# EAGLE board BoB Brain v02 (EAGLE 7.5.0)
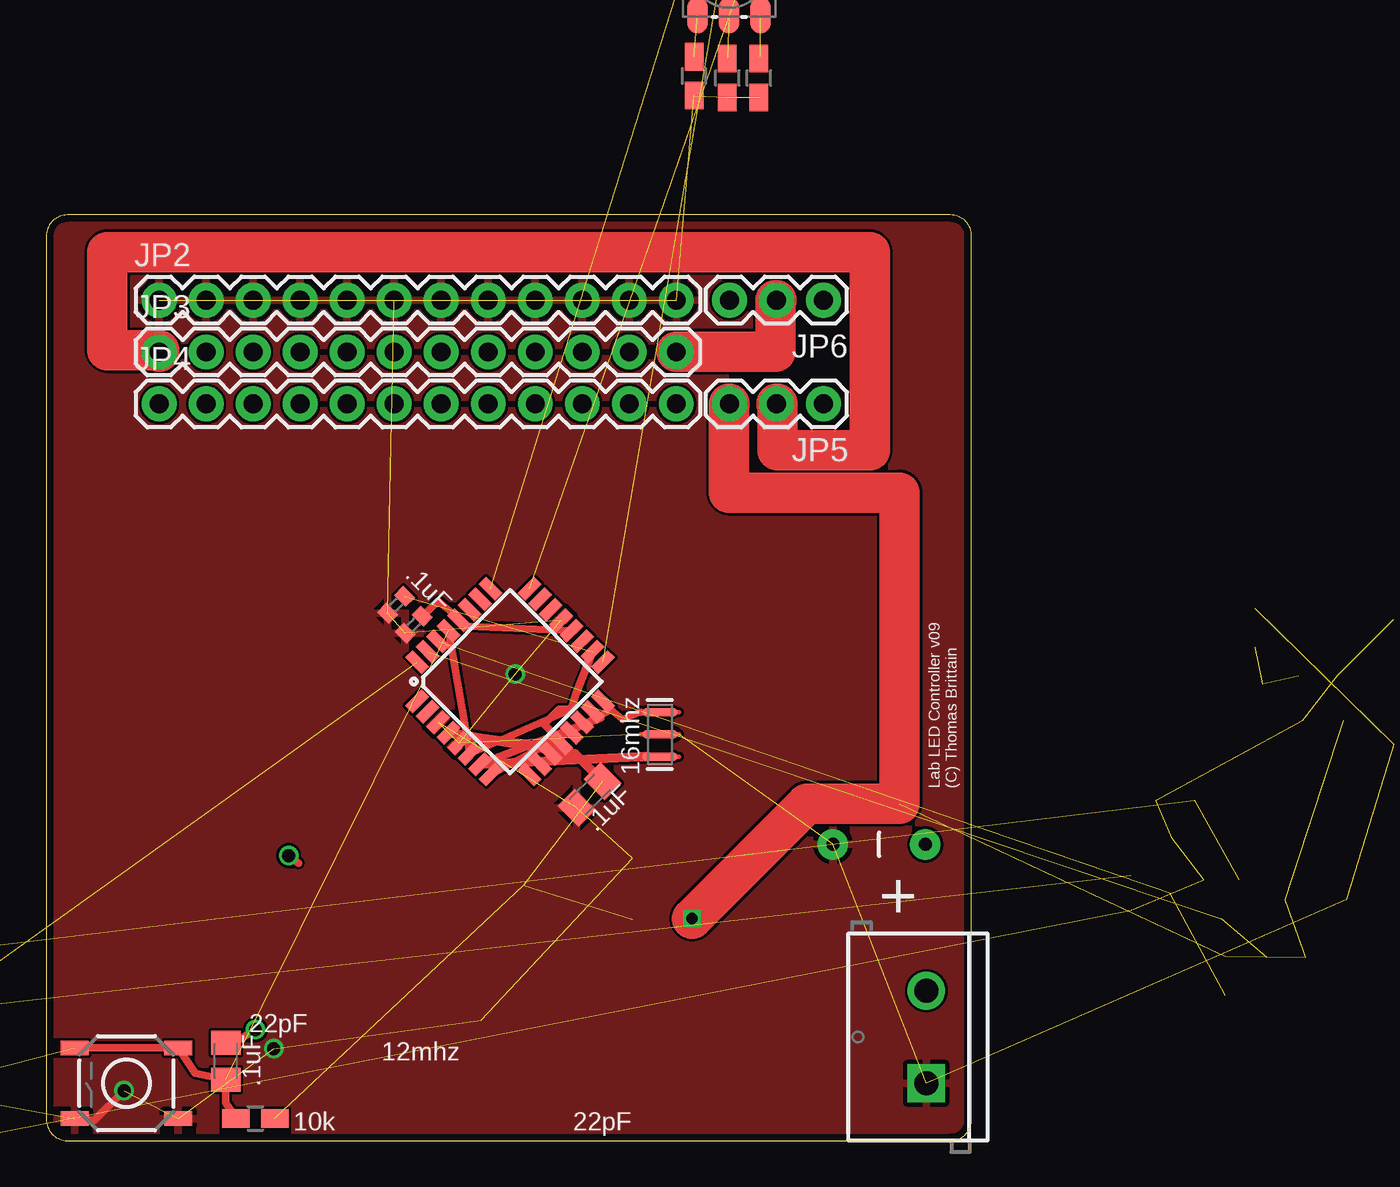
[diagram p0: board, top side]
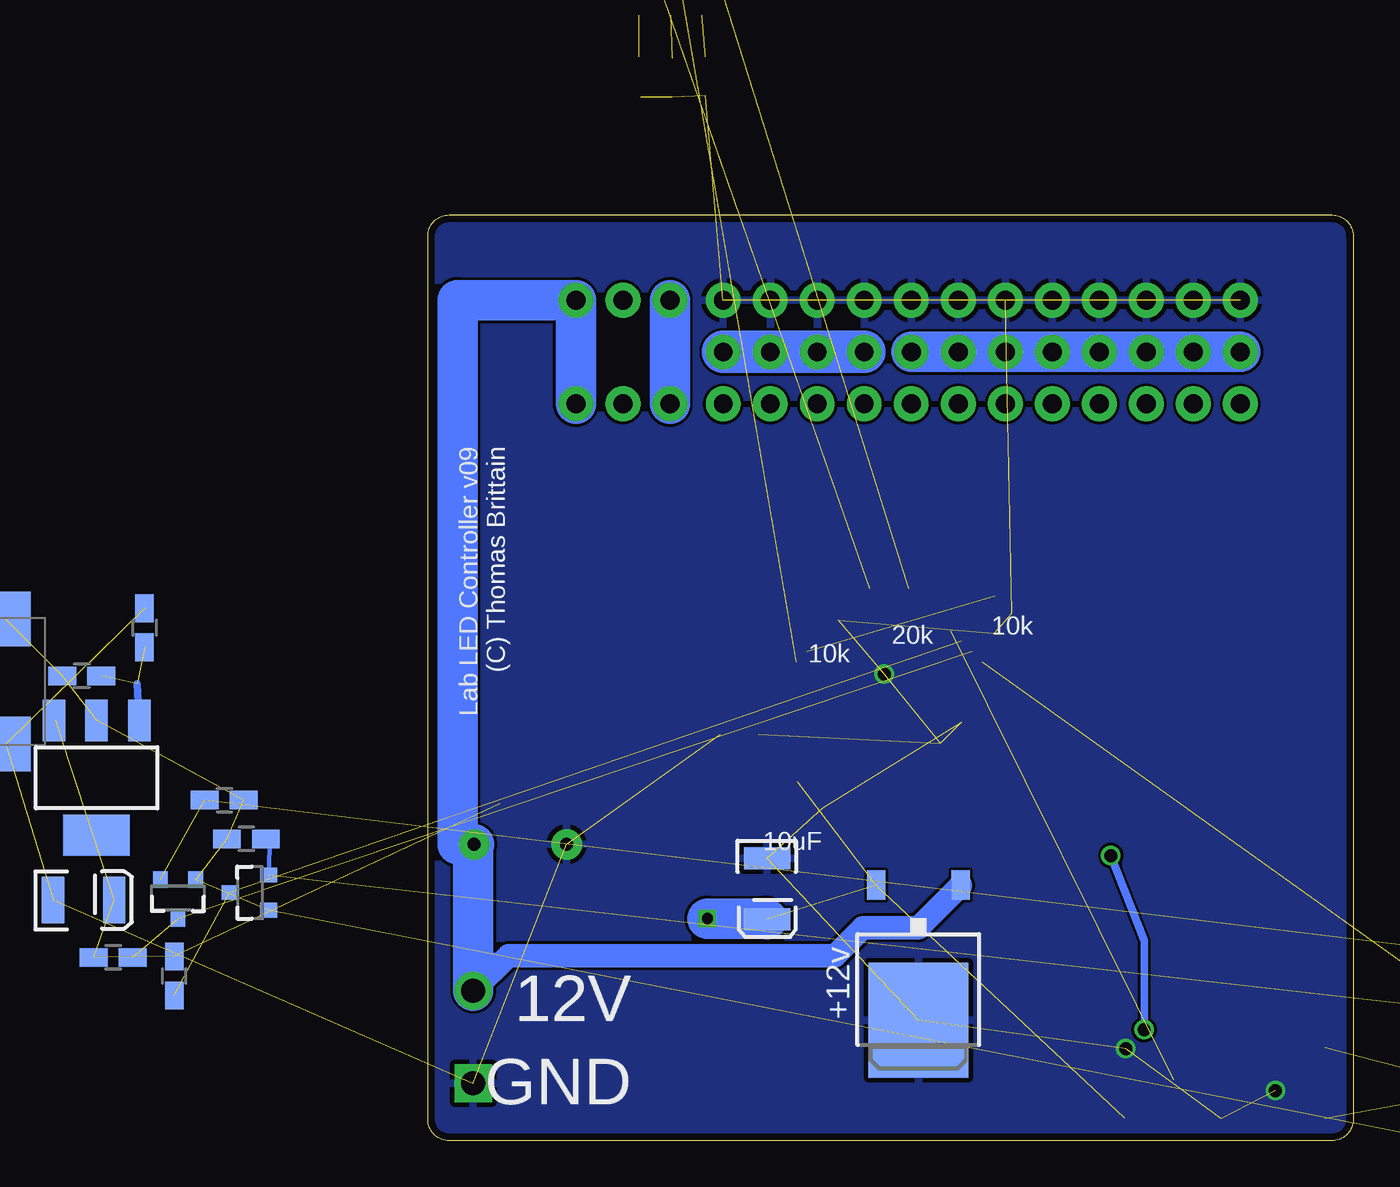
[diagram p1: board, bottom side, seen from below]

Size 50 x 50 mm. Coordinates in mm from the lower left corner, seen from the top.
Outline: 0,48.86 0,1.14 arc90 1.14,0 48.86,0 arc90 50,1.14 50,48.86 arc90 48.86,50 1.14,50 arc90 0,48.86
Copper layers (1*16): Top 0.0356mm / dielectric 1.5011mm / Bottom 0.0356mm
Design rules "LaenPCBOrder": minimum track width 6mil, minimum drill 13mil, track to track 6mil, track to pad 6mil, pad to pad 6mil, via to via 6mil, smd to smd 6mil, copper to edge 15mil, drill to drill 6mil, minimum pad ring 7mil, minimum via ring 7mil, stop-mask expansion 3mil, vias tented up to drill 0mil, thermal gap 10mil

## Footprints (pad centres in the part's own frame; a part is rotated, then mirrored left to right if it is on the bottom)
CAP-PTH-5MM = drill 0.7 pad 1.651: 1 -2.5,0; 2 2.5,0
EIA3528 = smd 1.2 x 2.5: A 1.65,0; C -1.65,0
C0402 = smd 0.7 x 0.9: 1 -0.65,0; 2 0.65,0
C0805K = smd 1.3 x 1.6: 1 -1,0; 2 1,0
D/7343-31W = smd 2.95 x 2.7: + 3.375,0; - -3.375,0
SCREWTERMINAL-5MM-2 = drill 1.3 pad 2.032 square: 1 0,0 | drill 1.3 pad 2.032: 2 5,0
1X12 = drill 1.016 pad 1.88: 1 0,0; 2 2.54,0; 3 5.08,0; 4 7.62,0; 5 10.16,0; 6 12.7,0; 7 15.24,0; 8 17.78,0; 9 20.32,0; 10 22.86,0; 11 25.4,0; 12 27.94,0
1X03 = drill 1.016 pad 1.88: 1 0,0; 2 2.54,0; 3 5.08,0
LED-TRICOLOR-5050 = smd 2 x 1.1: 1 -2.4,1.7; 2 -2.4,0; 3 -2.4,-1.7; 4 2.4,-1.7; 5 2.4,0; 6 2.4,1.7
SOT23-3 = smd 0.8 x 0.9: 1 -0.95,-1; 2 0.95,-1; 3 0,1.1
R0805W = smd 1.5 x 1: 1 -1.052,0; 2 1.052,0
TACTILE-SWITCH-SMD = smd 1.524 x 0.762: 1 -2.794,1.905; 2 2.794,1.905; 3 -2.794,-1.905; 4 2.794,-1.905
TQFP32-08 = smd 1.27 x 0.559: 1 -4.293,2.8; 2 -4.293,2; 3 -4.293,1.2; 4 -4.293,0.4; 5 -4.293,-0.4; 6 -4.293,-1.2; 7 -4.293,-2; 8 -4.293,-2.8; 17 4.293,-2.8; 18 4.293,-2; 19 4.293,-1.2; 20 4.293,-0.4; 21 4.293,0.4; 22 4.293,1.2; 23 4.293,2; 24 4.293,2.8 | smd 0.559 x 1.27: 9 -2.8,-4.293; 10 -2,-4.293; 11 -1.2,-4.293; 12 -0.4,-4.293; 13 0.4,-4.293; 14 1.2,-4.293; 15 2,-4.293; 16 2.8,-4.293; 25 2.8,4.293; 26 2,4.293; 27 1.2,4.293; 28 0.4,4.293; 29 -0.4,4.293; 30 -1.2,4.293; 31 -2,4.293; 32 -2.8,4.293
TO-252 = smd 1 x 1.6: 1 -2.28,-4.8; 2 2.28,-4.8 | smd 5.4 x 6.2: 3 0,2.5
SOT223 = smd 1.219 x 2.235: 1 -2.311,-3.099; 2 0,-3.099; 3 2.311,-3.099 | smd 3.6 x 2.2: 4 0,3.099
HM-11 = smd 1.9 x 0.9: 1 -0.3,11.5; 2 -0.3,10; 3 -0.3,8.5; 4 -0.3,7; 5 -0.3,5.5; 6 -0.3,4; 7 -0.3,2.5; 8 -0.3,1; 9 13.8,1; 10 13.8,2.5; 11 13.8,4; 12 13.8,5.5; 13 13.8,7; 14 13.8,8.5; 15 13.8,10; 16 13.8,11.5
RESONATOR-SMD = smd 0.45 x 1.905: 1 -1.2,0; 2 0,0; 3 1.2,0

## Placement (x,y rotation side)
C1  big  [CAP-PTH-5MM]  45,16 180 top
C2  10uF  [EIA3528]  31.66,13.61 270 bottom
C3  0.1uF  [C0402]  19.85,27.87 225 top
C4  0.1uF  [C0805K]  29.36,18.7 225 top
C5  0.1uF  [C0805K]  9.7,4.3 270 top
C8  0.1uF  [C0402]  18.9,28.94 225 top
C10  10uF  [EIA3528]  68.6,13 0 bottom  (outside the outline)
C11  470uF  [D/7343-31W]  72.8,24.8 90 bottom  (outside the outline)
JP1  12V_INPUT  [SCREWTERMINAL-5MM-2]  47.55,3.1 90 top
JP2  [1X12]  6.1,45.4 0 top
JP3  [1X12]  6.1,42.6 0 top
JP4  [1X12]  6.1,39.8 0 top
JP5  JUMPER-3PTH  [1X03]  42,39.8 180 top
JP6  JUMPER-3PTH  [1X03]  42,45.4 180 top
LED1  LED-TRICOLOR-5050NO_IC  [LED-TRICOLOR-5050]  36.9,63.2 270 top  (outside the outline)
Q1  MOSFET-NCHANNELAO3404A  [SOT23-3]  63.5,13.1 180 bottom  (outside the outline)
Q9  MOSFET-NCHANNELAO3404A  [SOT23-3]  59.6,13.4 90 bottom  (outside the outline)
R1  1K  [R0805W]  -23.6,-6.1 0 top  (outside the outline)
R2  1K  [R0805W]  -23.6,-12.2 0 top  (outside the outline)
R11  100k  [R0805W]  35,57.5 90 top  (outside the outline)
R12  100k  [R0805W]  38.5,57.4 90 top  (outside the outline)
R13  100k  [R0805W]  36.8,57.4 90 top  (outside the outline)
R14  10k  [R0805W]  11.3,1.2 0 top
R17  220  [R0805W]  68.7,25.1 180 bottom  (outside the outline)
R18  370  [R0805W]  65.3,27.7 270 bottom  (outside the outline)
R19  10k  [R0805W]  63.7,8.9 90 bottom  (outside the outline)
R20  10k  [R0805W]  67,9.9 180 bottom  (outside the outline)
R21  10k  [R0805W]  59.8,16.3 180 bottom  (outside the outline)
R22  10k  [R0805W]  61,18.4 0 bottom  (outside the outline)
S1  TAC_SWITCHSMD  [TACTILE-SWITCH-SMD]  4.33,3.1 180 top
U1  ATMEGA328P_TQFP  [TQFP32-08]  25.06,24.79 45 top
U3  +12v  [TO-252]  23.5,9 180 bottom
U4  V_REG_317SMD  [SOT223]  67.9,19.6 180 bottom  (outside the outline)
U$1  HM-11  [HM-11]  -24.3,-2.1 0 top  (outside the outline)
Y1  16MHZ  [RESONATOR-SMD]  33.16,21.94 90 top

## Library data of the parts
C1 = SparkFun-Passives
C2 C10 = SparkFun-Capacitors
C3-C5 C8 C11 R1 R2 R11-R14 R17-R22 = resistor
JP1 = SparkFun-Connectors; STOREFRONT_ID: PRT-08432
JP2-JP4 = SparkFun-Connectors
JP5 JP6 = SparkFun-Retired
LED1 = SparkFun-LED
Q1 Q9 = SparkFun-DiscreteSemi; PROD_ID: TRAN-12988
S1 = SparkFun-Retired; PROD_ID: SWCH-08247
U1 = SparkFun-DigitalIC; PROD_ID: IC-09069
U3 = SparkFun-PowerIC; PROD_ID: VREG-12370
U4 = SparkFun-PowerIC
U$1 = HM-11-ladvien
Y1 = SparkFun-FreqCtrl; PROD_ID: XTAL-08900

## Nets
3.35V: C11.+ Q1.1 Q9.1 R17.2 R21.2 R22.2 U4.2 U$1.9
3~: U1.1
4: U1.2
5~: U1.9
6V: JP3.9 JP3.10 JP3.11 JP3.12 JP6.2
6~: U1.10
7: U1.11
8: U1.12
9~: U1.13
10~: U1.14
11~: U1.15
12: U1.16
13: LED1.2 U1.17
A0: U1.23
A1: LED1.1 U1.24
A2: LED1.3 U1.25
A3: U1.26
A4-SDA: U1.27
A5-SCL: U1.28
ADC6: U1.19
ADC7: U1.22
ATMEGA-RESET: R2.1 U$1.14
DTR: C5.1
GND: C1.2 C2.C C3.2 C4.2 C8.2 C10.C C11.- JP1.1 JP2.1 JP2.2 JP2.3 JP2.4 JP2.5 JP2.6 JP2.7 JP2.8 JP2.9 JP2.10 JP2.11 JP2.12 R11.1 R12.1 R13.1 R18.1 S1.1 S1.2 U1.3 U1.5 U1.21 U3.3 U$1.12 Y1.2
HM-RESET: R1.1 U1.32
N$1: C3.1 U1.20
N$2: U1.7 Y1.1
N$6: LED1.4 R11.2
N$7: JP4.12
N$8: LED1.6 R12.2
N$9: LED1.5 R13.2
N$10: JP4.11
N$11: U1.8 Y1.3
N$12: Q1.2 R22.1 U$1.2
N$14: R17.1 R18.2 U4.1
N$15: Q9.2 R21.1 U$1.4
N$16: JP4.10
N$17: JP4.9
N$18: JP4.8
N$19: JP4.7
N$20: JP4.6
N$21: JP4.5
N$22: JP4.4
N$23: JP4.3
N$24: JP4.2
N$25: JP4.1
PIN_PWR: JP3.1 JP3.2 JP3.3 JP3.4 JP3.5 JP3.6 JP3.7 JP3.8 JP5.2
RAW: C1.1 JP1.2 JP5.1 JP6.1 U3.1
RESET: C5.2 R1.2 R2.2 R14.1 S1.3 S1.4 U1.29 U$1.11
U2_RX: Q1.3 R20.1 U1.31
U2_TX: Q9.3 R19.1 U1.30
VCC: C2.A C4.1 C8.1 C10.A JP5.3 JP6.3 R14.2 R19.2 R20.2 U1.4 U1.6 U1.18 U3.2 U4.3

## Tracks (layer width: path | path; a pad name or v marks a point on that pad's centre or on a via)
3.35V  (7 unrouted)
6V
  Top 2.184: JP6.2 39.4,45.4 39.4,42.6 JP3.12
  Bottom 2.286: JP3.12 JP3.11 JP3.10 JP3.9
13  (1 unrouted)
A1  (1 unrouted)
A2  (1 unrouted)
ATMEGA-RESET  (1 unrouted)
DTR  (via drill 0.7 pad 0.25)
  Top 0.406: C5.1 9.7,5 v11.3,6 | v13.1,15.4 13.63,15
  Bottom 0.406: v11.3,6 11.3,10.8 v13.1,15.4
GND  (via drill 0.7, 0.7 pad 0.25)  (33 unrouted)
  Top 0.406: S1.2 2.6,1.09 v4.2,2.7
  other vias: 12.3,4.97 25.33,25.2
  pour Bottom: -1,51 51,51 51,-2 -1,-2
  pour Top: -1,-2 -1,51 51,51 51,-2
HM-RESET  (1 unrouted)
N$1
  Top 0.406: U1.20 22.73,27.77 21.93,28.52 21.18,29.12 C3.1
N$2
  Top 0.406: U1.7 29.96,22.84 | 32.37,20.74 Y1.1
  Top 0.508: 32.37,20.74 32.05,20.74 U1.7
N$6  (1 unrouted)
N$8  (1 unrouted)
  Top 0.559: 38.6,58.55 R12.2
N$9  (1 unrouted)
N$11
  Top 0.406: U1.8 30.52,23.28 31.14,22.76 32.09,23.14 32.14,23.14
N$12  (2 unrouted)
N$14  (2 unrouted)
  Bottom 0.406: 65.7,24.69 U4.1
N$15  (1 unrouted)
  Bottom 0.254: 58.75,14.35 Q9.2 58.55,15.8 R21.1
PIN_PWR
  Top 2.184: JP5.2 39.5,39.8 39.5,37.3 44.5,37.3 44.5,48 3.3,48 3.3,42.7 6.1,42.7 JP3.1
  Bottom 2.184: JP3.8 JP3.7 JP3.6 JP3.5 JP3.4 JP3.3 JP3.2 JP3.1
RAW
  Bottom 1.27: U3.1 21.22,13.78 23.5,11.5 26.5,11.5 28,10 45.65,10 JP1.2
  Bottom 1.422: JP1.2 46.49,9.45
  Bottom 2.184: JP1.2 47.55,16 C1.1 48.4,16 48.4,45.4 JP6.1 JP5.1
RESET  (4 unrouted)
  Top 0.406: R14.1 9.7,2.05 C5.2 8.05,3.65 S1.3 S1.4 | U1.29 22.86,21.14
U2_RX  (2 unrouted)
U2_TX  (2 unrouted)
VCC  (via drill 0.6)  (8 unrouted)
  Top 0.406: U1.4 28.26,21.14 26.9,22.5 27.7,23.3 28.36,23.3 | 28.36,23.3 U1.6 | U1.18 28.64,24.14 28.36,23.3
  Top 0.508: U1.4 28.57,20.91 C4.1
  Top 2.184: JP5.3 36.9,39.8 36.9,35 46.1,35 46.1,18.2 41.1,18.2 v34.9,12
  Bottom 0.406: 70.1,22.7 U4.3
  Bottom 2.184: JP5.3 JP6.3 | v34.9,12 31.71,12 C2.A

## Text on the board
tNames: 100k | .1uF | 16mhz | Lab LED Controller v09 / (C) Thomas Brittain | .1uF | + | .1uF | 22pF | 12mhz | 10k | 22pF
bNames: Lab LED Controller v09 / (C) Thomas Brittain | 10k | 20k | 10k | 10uF | 12V | GND